# Altium PCB New Gyro 4.0.PcbDoc (part 2 of 2)
Units mm, origin at the board's own origin, x right, y up, seen from the top; angles counter-clockwise.
Board outline 67.56 x 93.22 mm, 4 copper layers (ANALOG, GND, VCC, DIGITAL); 253 components, 139 nets, 766 pads, 207 vias.
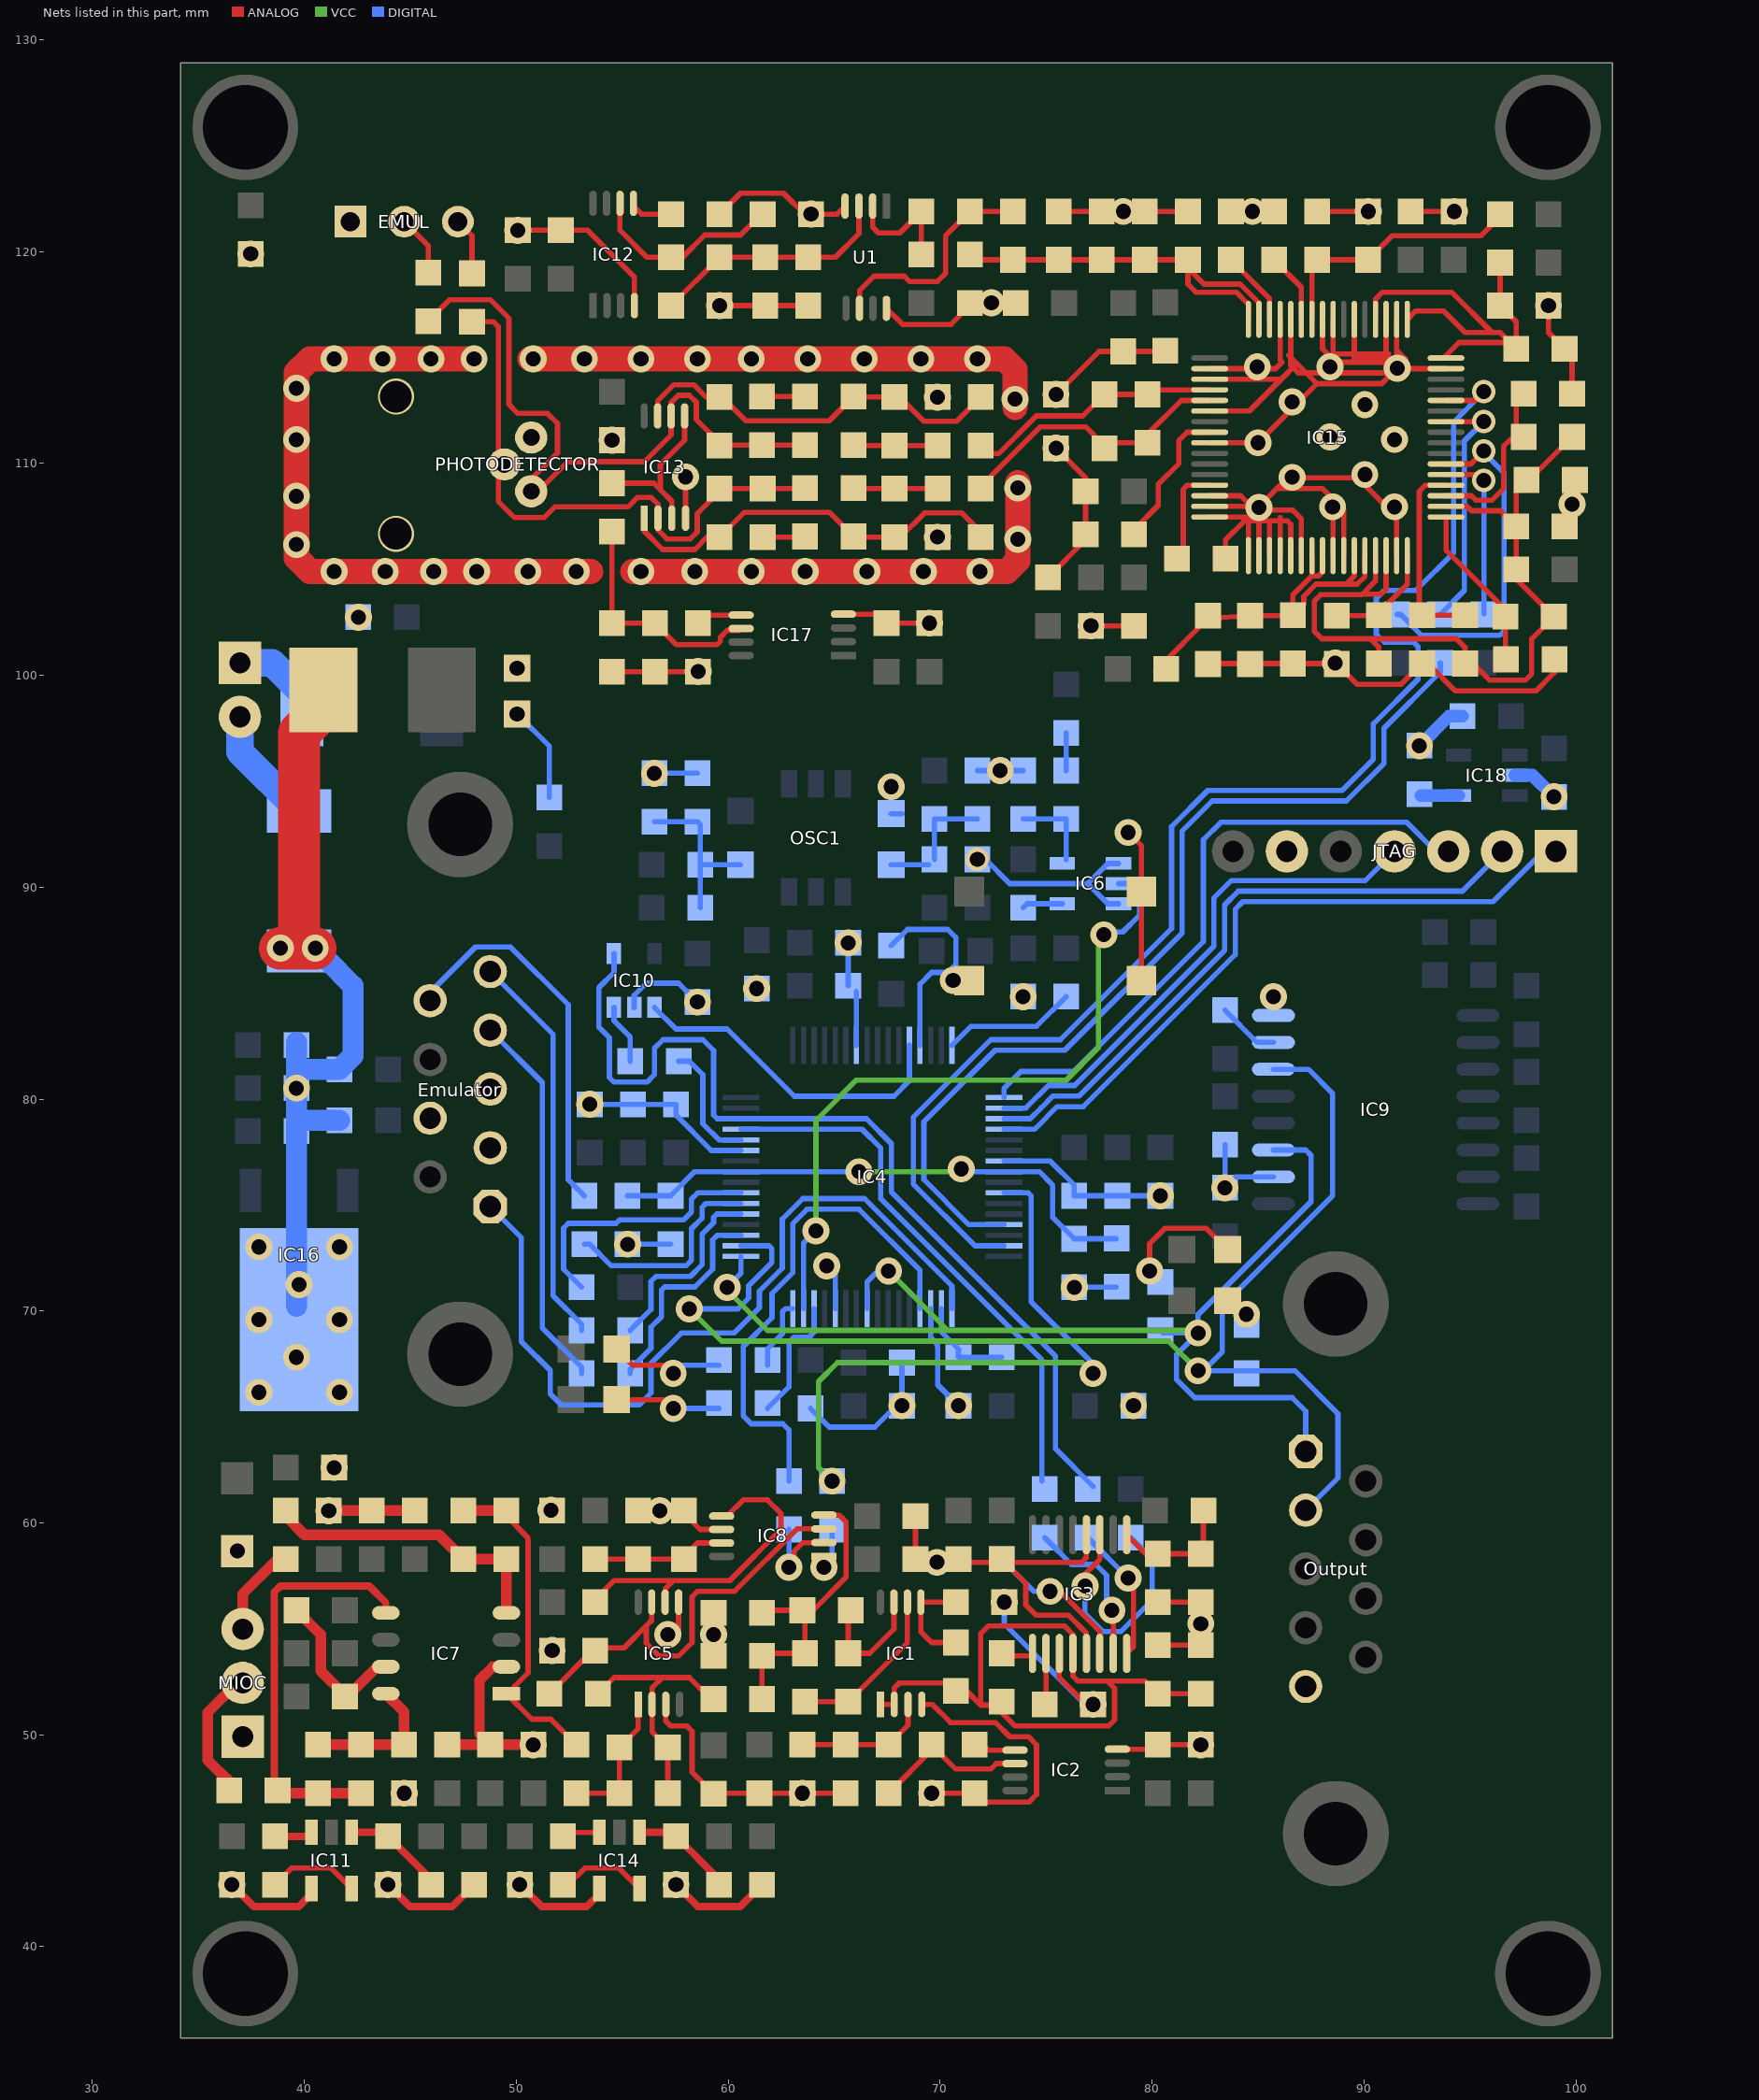
[diagram p4: the nets of this part, all layers, seen from the top]

## Via types
v1: diameter 1.27, hole 0.711, ANALOG to DIGITAL, 198 vias
v2: diameter 1.1, hole 0.711, ANALOG to DIGITAL, 7 vias
v3: diameter 1.7, hole 1.5, ANALOG to DIGITAL, 2 vias

## Nets (pads, with @x,y where several pads share a name; then routed paths per layer and width w, separated by ;. In a path a pad name is that pad's centre, name@x,y a point inside that pad or via, vN(x,y) a via of type N, cw(c..) or ccw(c..) an arc to the next point about the centre after c; other vN are vias at no path point) (continued)
GND: C1.1 C2.1 C3.1 C4.1 C5.1 C6.1 C7.1 C8.1 C9.1 C10.1 C11.1 C12.1 C13.1 C14.1 C15.1 C16.2 C17.2 C18.1 C19.1 C20.1 C21.1 C22.2 C23.2 C24.1 C25.1 C26.2 C27.2 C28.2 C29.1 C30.1 C31.1 C34.1 C35.2 C36.2 C38.1 C40.2 C41.2 C42.1 C43.1 C44.1 C45.1 C47.1 C48.1 C49.2 C50.2 C51.1 C53.2 C54.1 C55.1 C56.1 C57.1 C58.1 C59.1 C66.1 C67.1 C68.2 C69.2 C70.2 C71.2 C72.2 C73.1 C74.1 C75.2 C76.2 C77.2 C78.2 C79.2 C80.2 C81.1 C82.1 C84.1 C85.2 C86.2 C88.2 C89.1 C90.2 C91.2 C92.2 C93.2 C94.2 C95.1 C96.2 C97.2 C98.1 C99.1 C100.2 C101.1 C102.1 C103.1 C104.1 C105.1 C106.1 C107.2 C108.2 C109.2 C110.2 C112.2 C113.2 C114.2 C116.2 C117.2 C118.2 C119.2 C120.1 C121.2 C122.1 C123.1 C126.1 C127.2 C128.1 C129.1 C130.1 C131.1 C132.2 C133.1 CAL.2 D6.K EMUL.1 Emulator.2 Emulator.3 Emulator.7 IC1.4 IC2.4 IC3.4 IC3.13 IC4.3 IC4.12 IC4.27 IC4.39 IC4.55 IC5.3 IC5.5 IC6.1 IC6.3 IC7.2 IC8.6 IC9.2 IC9.8 IC10.2 IC11.4 IC12.4 IC13.4 IC14.4 IC15.2 IC15.3 IC15.6 IC15.9 IC15.14 IC15.15 IC15.16 IC15.17 IC15.18 IC15.19 IC15.20 IC15.21 IC15.22 IC15.25 IC15.26 IC15.31 IC15.47 IC15.50 IC15.51 IC15.54 IC15.56 IC15.57 IC15.60 IC15.61 IC16.2 IC17.4 IC18.2 JTAG.6 L8.1 MIOC.1 OSC1.4 Output.5 PHOTODETECTOR.S R8.1 R32.1 R41.2 R63.1 R65.1 R66.1 R71.1 R73.1 R76.2 RST.2 U1.4 U1.8 | length 465.2
  ANALOG w0.25: IC11.4@40.325,42.484 IC11.4@40.325,42.742 ; C74.1@43.839,42.926 v1(43.942,42.926) ; C41.2@48.26,50.038 C41.2@48.768,49.53 ; IC7.2@48.895,53.213 IC7.2@49.53,53.213 ; v1(50.066,121.003) C89.1@52.098,121.003 53.368,121.003 55.572,118.799 IC12.4@55.572,117.447 ; IC14.4@53.914,42.484 IC14.4@53.914,42.742 ; C122.1@54.511,100.175 C123.1@56.543,100.175 v1(58.575,100.175) ; v1(56.769,60.579) 57.785,60.579 58.674,59.69 IC8.6@59.69,59.69 ; IC5.3@57.053,51.435 57.053,50.643 57.277,50.419 58.039,50.419 58.293,50.165 58.293,48.235 C34.1@59.309,47.219 59.334,47.244 C35.2@61.468,47.244 v1(63.5,47.244) C28.2@65.532,47.244 ; v1@57.277,54.483 57.658,54.864 IC5.5@57.658,56.261 ; IC13.4@57.985,107.414 v1(57.985,109.364) ; C54.1@59.309,53.721 C53.2@59.309,55.753 ; v1(59.591,117.447) C94.2@61.75,117.447 C95.1@63.782,117.447 ; C92.2@59.591,121.765 60.576,122.75 62.608,122.75 63.592,121.765 v1(63.909,121.765) 65.134,121.765 U1.4@65.515,122.146 ; IC17.4@65.433,102.887 67.039,102.887 C120.1@67.465,102.461 v1(69.497,102.461) ; U1.8@67.465,117.32 68.227,116.558 70.513,116.558 71.529,117.574 C71.2@73.561,117.574 ; C14.1@68.834,60.325 C13.1@68.834,58.293 68.985,58.142 C31.1@72.898,58.142 ; IC1.4@69.133,51.435 69.624,51.435 70.482,50.577 72.613,50.577 73.279,49.911 74.168,49.911 74.549,49.53 74.549,47.184 74.186,46.821 72.051,46.821 C27.2@71.628,47.244 v1(69.596,47.244) ; C31.1@72.898,58.293 C31.1@73.049,58.142 ; C101.1@75.085,104.62 76.863,106.398 R66.1@76.863,106.652 C102.1@76.863,108.684 76.863,109.319 v1(75.466,110.716) ; v1(75.466,113.256) 77.498,115.288 C96.2@78.641,115.288 C97.2@80.597,115.288 ; C78.2@75.593,121.892 C79.2@77.625,121.892 C80.2@79.657,121.892 C84.1@81.689,121.892 ; 76.898,54.807 76.063,55.642 74.533,55.642 74.041,56.134 74.041,57.15 C31.1@73.049,58.142 ; IC3.4@76.898,59.442 76.898,58.356 76.684,58.142 C31.1@73.049,58.142 ; v1(77.117,102.334) C104.1@79.149,102.334 ; IC2.4@78.359,49.321 C24.1@80.055,49.321 ; v1(78.867,92.583) 79.502,91.948 CAL.2@79.502,85.598 ; C24.1@80.264,49.53 v1(82.296,49.53) ; C18.1@80.264,54.229 C15.1@82.296,54.229 C16.2@82.296,56.261 C17.2@80.264,56.261 ; C116.2@82.668,100.556 C118.2@86.642,100.556 88.687,100.556 R73.1@88.713,100.531 89.672,99.571 91.753,99.571 R63.1@92.738,100.556 93.02,100.556 94.309,99.268 98.125,99.268 98.986,100.129 R71.1@98.986,100.752 ; IC15.16@82.718,107.474 84.543,107.474 ; IC15.15@82.718,107.974 v1@84.685,107.974 ; IC15.14@82.718,108.474 84.185,108.474 v1@84.685,107.974 ; IC15.9@82.718,110.974 v1(84.995,110.974) 87.785,113.764 ; IC15.6@82.718,112.474 84.59,112.474 86.09,113.974 ; IC15.3@82.718,113.974 86.09,113.974 ; IC15.2@82.718,114.474 85.828,114.474 86.134,114.78 86.043,114.871 IC15.61@86.043,116.799 ; C112.2@83.467,105.509 83.467,106.398 84.356,107.287 ; 84.356,107.414 84.356,107.287 ; IC15.17@84.543,105.649 84.543,107.287 ; v1@85.019,107.95 86.388,109.319 89.69,109.319 91.543,107.466 IC15.31@91.543,105.649 ; IC15.18@85.043,105.649 85.043,107.287 ; v1(85.043,107.926) v1@85.043,107.795 ; IC15.19@85.543,105.649 85.543,107.287 ; 86.007,108.811 88.039,108.811 89.043,107.807 IC15.26@89.043,105.649 ; IC15.20@86.043,105.649 86.043,107.442 ; 86.452,115.097 86.833,114.716 ; IC15.21@86.543,105.649 86.543,107.132 86.388,107.287 85.543,107.287 ; IC15.60@86.543,116.799 86.543,114.625 86.896,114.272 91.341,114.272 v1@91.976,114.907 ; IC15.22@87.043,105.649 87.043,107.394 86.642,107.795 v1@85.043,107.795 ; C67.1@87.785,121.892 v1(90.198,121.892) ; IC15.57@88.043,116.799 88.043,115.411 88.674,114.78 91.341,114.78 91.722,115.161 ; IC15.25@88.543,105.649 88.543,107.291 ; IC15.56@88.543,116.799 88.543,115.161 91.162,115.161 ; IC15.54@89.543,116.799 89.543,114.935 v1@91.543,114.935 ; v1@91.043,114.427 IC15.51@91.043,116.799 ; v1@91.543,114.78 IC15.50@91.543,116.799 ; 91.543,115.34 91.722,115.161 ; v1@91.722,114.399 v1@91.722,114.907 ; v1@91.722,114.653 v1@91.976,114.907 ; v1@92.075,114.474 IC15.47@93.868,114.474 ; C69.2@92.23,121.892 v1(94.262,121.892) ; v1(98.707,117.447) 98.707,116.177 C77.2@99.469,115.415 99.822,115.062 R65.1@99.822,113.284 ; C110.2@99.469,107.033 C131.1@99.469,109.065 ; 84.356,107.287 84.543,107.474 ; 84.543,107.287 85.043,107.287 ; 84.543,107.287 84.543,107.474 ; v1@84.685,107.974 84.864,107.795 v1@85.043,107.795 ; 85.043,107.287 85.543,107.287 ; 85.043,107.287 v1@85.043,107.795 ; 86.09,113.974 86.833,114.716 ; 86.833,114.716 87.785,113.764 ; 87.785,113.764 90.833,113.764 v1@91.976,114.907 ; 91.722,115.161 v1@91.976,114.907
  ANALOG w0.35: v1(36.576,42.926) 37.611,41.891 39.732,41.891 IC11.4@40.325,42.484 ; v1(43.942,42.926) 44.977,41.891 46.971,41.891 C75.2@48.006,42.926 ; v1(50.165,42.926) 51.2,41.891 53.321,41.891 IC14.4@53.914,42.484 ; v1(57.531,42.926) 58.566,41.891 60.56,41.891 C100.2@61.595,42.926
  ANALOG w0.5: v1(41.148,60.579) C49.2@43.18,60.579 C50.2@45.212,60.579 ; C40.2@46.736,49.53 C41.2@48.768,49.53 v1(50.8,49.53) ; C41.2@48.26,50.038 48.26,52.578 IC7.2@48.895,53.213
  ANALOG w1.2: 39.624,105.537 39.624,114.3 40.259,114.935 v1(48.006,114.935) ; 39.751,105.41 40.259,104.902 v1(48.133,104.902) v1(50.546,104.902) 53.499,104.902 ; v1@50.641,114.935 73.025,114.935 73.533,114.427 v1@73.533,112.649 ; v1@55.499,104.902 73.152,104.902 73.66,105.41 v1@73.66,109.093
  ANALOG w2: v1(38.862,87.122) 39.751,87.122 ; v1(40.513,87.122) 39.751,87.122 ; C91.2@40.894,98.425 39.751,97.282 39.751,87.122
  DIGITAL w0.25: v1(53.467,79.756) C2.1@55.499,79.756 C1.1@57.531,79.756 57.531,79.248 59.202,77.577 IC4.27@60.592,77.577 ; v1(55.245,73.152) C57.1@57.277,73.152 ; IC10.2@55.562,84.328 55.562,84.9 56.134,85.471 57.658,85.471 v1(58.547,84.582) ; v1(56.515,95.377) C21.1@58.547,95.377 ; C7.1@63.881,65.405 64.764,64.522 66.923,64.522 67.933,65.532 v1(68.199,65.532) C8.1@68.199,67.564 ; v1(64.643,72.136) 65.052,71.727 IC4.12@65.052,70.117 ; C10.1@65.659,85.344 v1(65.659,87.376) ; IC4.39@66.052,82.537 C10.1@66.052,85.078 ; OSC1.4@67.691,93.472 OSC1.4@68.199,93.472 ; IC4.3@69.552,70.117 69.552,68.751 69.85,68.453 69.85,68.398 69.881,68.367 69.881,66.517 v1(70.866,65.532) ; v2(71.755,91.313) 72.136,91.313 73.279,90.17 76.962,90.17 ; C25.1@71.755,95.504 C47.1@73.914,95.504 ; IC4.55@73.012,77.077 75.196,77.077 76.327,75.946 C4.1@76.327,75.438 C5.1@78.359,75.438 v1(80.391,75.438) ; v1(76.327,71.12) C58.1@78.308,71.12 ; IC6.3@78.416,89.22 77.912,89.22 76.962,90.17 ; IC6.1@78.416,91.12 77.912,91.12 76.962,90.17 ; R32.1@83.439,77.851 v1(83.439,75.819) 83.947,76.327 IC9.2@85.725,76.327
  DIGITAL w0.6: v1(92.616,96.68) 94.013,98.077 C130.1@94.648,98.077 ; IC18.2@97.118,95.283 97.95,95.283 v1(98.966,94.267)
  DIGITAL w1: IC16.2@39.624,70.231 C105.1@39.624,78.994 ; C127.2@39.624,82.677 39.624,81.407 ; L8.1@41.021,86.614 42.291,85.344 42.291,82.042 C106.1@41.656,81.407 39.624,81.407 ; C108.2@41.656,78.994 C105.1@39.624,78.994 ; C105.1@39.624,78.994 39.624,81.407
  other v1: 44.704,47.244 51.689,53.975 57.15,54.737 59.309,54.737 82.296,55.245 69.85,58.142 36.83,58.674 51.638,60.604 41.402,62.611 79.121,65.532 37.846,66.167 41.656,66.167 39.624,67.818 37.846,69.596 41.656,69.596 39.751,71.247 37.846,73.025 41.656,73.025 39.624,80.518 73.914,84.836 85.725,84.836 61.341,85.217 67.691,94.742 72.834,95.504 50.038,100.33 88.646,100.584 42.545,102.743 41.402,104.902 43.815,104.902 46.101,104.902 52.832,104.902 55.88,104.902 58.42,104.902 61.087,104.902 63.627,104.902 66.548,104.902 69.215,104.902 71.882,104.902 39.624,106.172 73.66,106.426 69.878,106.525 88.519,107.95 91.44,107.95 99.822,108.077 39.624,108.458 73.66,108.839 86.614,109.347 90.043,109.474 54.511,111.097 39.624,111.125 91.44,111.125 88.392,111.252 90.043,112.776 86.614,112.903 73.533,113.03 69.878,113.129 39.624,113.538 91.567,114.498 84.963,114.554 88.392,114.554 41.402,114.935 43.688,114.935 45.974,114.935 50.8,114.935 53.213,114.935 55.88,114.935 58.547,114.935 61.087,114.935 63.754,114.935 66.421,114.935 69.088,114.935 71.755,114.935 72.418,117.574 37.465,119.888 78.641,121.892 84.737,121.892
  other v3: 44.323,106.68 44.323,113.157
NetC15_2: C15.2 C18.2 C32.2 IC1.1 IC1.2 IC3.12 R14.2 | length 31.3
  ANALOG w0.25: IC1.1@67.183,51.435 IC1.2@67.833,51.435 67.833,52.212 68.072,52.451 R14.2@70.612,52.451 ; R14.2@70.358,52.07 R14.2@70.739,52.07 71.247,52.07 71.913,51.404 ; C15.2@82.296,51.943 C18.2@80.264,51.943 79.665,52.542 77.887,52.542 ; 71.913,51.404 72.548,51.404 73.533,50.419 77.95,50.419 78.232,50.701 78.232,52.197 77.887,52.542 ; 71.913,51.404 71.913,54.768 72.287,55.142 75.856,55.142 76.263,54.735 IC3.12@76.263,53.842 76.263,52.768 76.49,52.542 77.887,52.542
NetC16_1: C16.1 C17.1 IC3.1 L2.2 | length 5.9
  ANALOG w0.25: IC3.1@78.803,59.442 79.698,58.547 C17.1@80.264,58.547 C16.1@82.296,58.547 82.423,58.674 L2.2@82.423,60.579
NetC19_2: C19.2 IC4.2 L1.2 | length 4.7
  DIGITAL w0.25: IC4.2@70.052,70.117 70.052,69.013 70.866,68.199 C19.2@70.866,67.818 L1.2@72.898,67.818
NetC21_2: C21.2 C22.1 OSC1.9 R2.1 R4.1 | length 8.1
  DIGITAL w0.25: C22.1@56.515,93.091 C21.2@58.547,93.091 58.674,92.964 R4.1@58.674,91.059 ; R2.1@58.674,89.027 R4.1@58.674,91.059 ; OSC1.9@60.579,91.059 R4.1@58.674,91.059
NetC25_2: C25.2 OSC1.5 R1.1 R5.1 | length 5.7
  DIGITAL w0.25: OSC1.5@67.691,91.059 R5.1@69.469,91.059 ; R5.1@69.723,91.313 R1.1@69.723,93.218 C25.2@71.755,93.218
NetC26_1: C26.1 IC2.6 R9.1 | length 7.6
  ANALOG w0.25: R9.1@67.564,47.244 69.596,49.276 C26.1@69.596,49.53 70.739,48.387 72.39,48.387 72.644,48.641 IC2.6@73.533,48.641
NetC27_1: C27.1 IC2.5 | length 1.6
  ANALOG w0.25: C27.1@72.009,49.53 72.263,49.276 IC2.5@73.533,49.276
NetC28_1: C28.1 C29.2 IC1.3 R9.2 | length 6.3
  ANALOG w0.25: C29.2@63.5,49.53 C28.1@65.532,49.53 R9.2@67.564,49.53 68.483,50.449 IC1.3@68.483,51.435
NetC32_1: C32.1 IC3.9 | length 1.5
  ANALOG w0.25: C32.1@72.898,53.721 74.237,53.721 IC3.9@74.358,53.842
NetC33_1: C33.1 IC3.10 | length 2.4
  ANALOG w0.25: C33.1@74.93,51.435 74.993,51.498 IC3.10@74.993,53.842
NetC33_2: C33.2 IC3.11 R13.2 | length 10
  ANALOG w0.25: IC3.11@75.629,53.842 75.62,53.833 75.62,52.705 76.89,51.435 v1(77.216,51.435)
  DIGITAL w0.25: v1(73.025,56.261) 73.025,55.245 76.835,51.435 v1(77.216,51.435)
NetC37_1: C37.1 IC5.7 IC8.3 R18.2 | length 20.3
  ANALOG w0.25: R18.2@51.562,51.943 53.721,54.102 55.087,54.102 56.134,55.149 ; IC5.7@56.388,56.261 56.388,55.403 56.134,55.149 ; IC8.3@64.516,59.72 63.245,59.72 60.302,56.777 58.555,56.777 58.293,56.515 58.293,54.356 57.658,53.721 56.738,53.721 56.134,54.325 56.134,55.149
NetC37_2: C37.2 IC5.6 IC8.5 | length 15.4
  ANALOG w0.25: C37.2@53.721,56.388 54.61,57.277 57.404,57.277 ; IC5.6@57.023,56.261 57.023,56.896 57.404,57.277 ; IC8.5@59.69,60.325 59.944,60.325 60.706,61.087 61.849,61.087 62.484,60.452 62.484,59.69 60.071,57.277 57.404,57.277
NetC39_1: C39.1 IC7.1 R19.2 R22.1 | length 16.4
  ANALOG w0.25: R19.2@47.117,60.579 R19.2@47.498,60.579 ; C39.1@49.53,60.579 49.53,60.325 50.546,59.309 50.546,59.177 50.555,59.168 50.555,52.923 49.911,52.279 49.911,51.943 IC7.1@49.53,51.943 50.736,50.736 51.625,50.736 R22.1@52.832,49.53
  ANALOG w0.5: R19.2@47.498,60.579 C39.1@49.53,60.579
NetC39_2: C39.2 IC7.4 R19.1 R31.2 | length 14
  ANALOG w0.5: R31.2@39.116,60.579 39.116,60.325 40.005,59.436 46.355,59.436 R19.1@47.498,58.293 C39.2@49.53,58.293 IC7.4@49.53,55.753
NetC44_2: C44.2 C45.2 IC8.7 L3.2 | length 6.3
  ANALOG w0.25: L3.2@53.721,58.293 C44.2@55.753,58.293 57.785,58.293 58.547,59.055 IC8.7@59.69,59.055
NetC46_1: C46.1 IC5.1 R22.2 R37.1 | length 6.6
  ANALOG w0.25: R22.2@52.832,47.244 R37.1@54.864,47.244 C46.1@54.864,49.403 55.753,50.292 IC5.1@55.753,51.435
NetC46_2: C46.2 IC5.2 R18.1 R37.2 R38.2 | length 12.2
  ANALOG w0.25: R18.1@53.848,51.943 54.61,52.705 56.896,52.705 ; R37.2@57.15,47.244 C46.2@57.15,49.403 56.403,50.15 IC5.2@56.403,51.435 56.403,52.212 56.896,52.705 ; R38.2@59.309,51.689 59.182,51.689 58.166,52.705 56.896,52.705
NetC47_2: C47.2 IC6.5 R39.2 | length 3.9
  DIGITAL w0.25: C47.2@73.914,93.218 R39.2@75.946,93.218 IC6.5@75.946,91.304
NetC52_1: C52.1 IC7.8 R41.1 R43.2 | length 6.8
  ANALOG w0.5: C52.1@40.64,49.53 R43.2@42.672,49.53 R41.1@44.704,49.53 44.704,51.079 IC7.8@43.84,51.943
NetC52_2: C52.2 IC7.5 R36.2 R43.1 | length 20.1
  ANALOG w0.25: R36.2@38.481,47.625 R36.2@38.735,47.371
  ANALOG w0.35: R36.2@38.989,47.117 38.588,47.518 38.588,56.749 38.862,57.023 43.053,57.023 43.84,56.236 IC7.5@43.84,55.753
  ANALOG w0.5: R36.2@38.862,47.244 C52.2@40.64,47.244 R43.1@42.672,47.244
NetC53_1: C53.1 C54.2 IC8.4 R38.1 R42.1 R46.1 | length 14.5
  ANALOG w0.25: R38.1@61.595,51.689 C54.2@61.595,53.721 ; C54.2@61.595,53.848 R46.1@63.627,53.848 63.627,55.753 R42.1@63.5,55.88 ; C53.1@61.595,55.88 R42.1@63.5,55.88 ; IC8.4@64.516,60.37 65.233,60.37 65.563,60.04 65.563,57.435 64.008,55.88 R42.1@63.5,55.88
NetC62_1: C62.1 IC1.7 R42.2 | length 6
  ANALOG w0.25: R42.2@65.786,55.88 65.659,55.753 C62.1@65.659,53.848 66.675,53.848 67.818,54.991 IC1.7@67.818,56.261
NetC62_2: C62.2 IC1.6 R46.2 | length 7.9
  ANALOG w0.25: R46.2@63.627,51.562 C62.2@65.659,51.562 68.453,54.356 IC1.6@68.453,56.261
NetC64_1: C64.1 IC11.3 | length 1.5
  ANALOG w0.35: C64.1@38.608,45.212 IC11.3@40.141,45.212
NetC64_2: C64.2 IC11.5 | length 4.3
  ANALOG w0.25: C64.2@38.608,42.926 39.399,43.717 41.25,43.717 IC11.5@42.225,42.742
NetC65_1: C65.1 R47.1 U1.2 | length 5.9
  ANALOG w0.25: U1.2@66.815,122.146 66.815,121.145 67.084,120.876 68.1,120.876 C65.1@69.116,121.892 R47.1@69.116,119.86
NetC65_2: C65.2 R52.1 U1.6 | length 10.9
  ANALOG w0.25: U1.6@66.195,117.32 66.195,118.154 66.877,118.836 68.307,118.836 68.553,118.59 69.878,118.59 70.259,118.971 70.259,120.749 C65.2@71.402,121.892 R52.1@73.434,121.892
NetC66_2: C66.2 C67.2 IC15.58 L5.2 | length 12.5
  ANALOG w0.25: IC15.58@87.543,116.799 87.543,119.364 C67.2@87.785,119.606 C66.2@90.198,119.606 91.341,120.749 95.532,120.749 96.421,121.638 L5.2@96.421,121.765
NetC70_1: C70.1 R48.2 R49.1 | length 3.9
  ANALOG w0.25: R48.2@65.941,108.811 R49.1@67.846,108.811 C70.1@69.878,108.811
NetC74_2: C74.2 IC11.1 R50.1 | length 4.7
  ANALOG w0.25: R50.1@45.974,42.926 R50.1@45.974,43.18
  ANALOG w0.35: IC11.1@42.225,45.396 C74.2@43.758,45.396 ; C74.2@43.942,45.212 R50.1@45.974,43.18
NetC76_1: C76.1 C77.1 IC15.48 IC15.49 IC15.52 L6.1 | length 21.2
  ANALOG w0.25: IC15.52@90.543,116.799 90.543,117.756 90.869,118.082 94.135,118.082 96.04,116.177 ; IC15.49@92.043,116.799 92.437,117.193 93.754,117.193 94.77,116.177 96.04,116.177 ; IC15.48@93.754,114.974 94.485,115.705 C77.1@96.893,115.705 ; L6.1@96.421,119.479 C76.1@96.421,117.447 97.183,116.685 C77.1@97.183,115.415 C77.1@96.893,115.705 ; 96.04,116.177 96.421,116.177 C77.1@96.893,115.705
NetC78_1: C78.1 C79.1 C80.1 C84.2 IC15.63 IC15.64 R47.2 R52.2 | length 20.2
  ANALOG w0.25: R47.2@71.529,119.86 71.783,119.606 R52.2@73.434,119.606 C78.1@75.593,119.606 C79.1@77.625,119.606 C80.1@79.657,119.606 C84.2@81.689,119.606 C84.2@81.689,119.225 ; IC15.64@84.543,116.799 84.543,117.514 83.975,118.082 82.07,118.082 81.689,118.463 C84.2@81.689,119.225 ; IC15.63@85.043,116.799 85.043,117.577 84.157,118.463 82.451,118.463 C84.2@81.689,119.225
NetC81_2: C81.2 IC15.62 | length 3.6
  ANALOG w0.25: C81.2@83.721,119.606 85.543,117.784 IC15.62@85.543,116.799
NetC82_2: C82.2 IC15.59 | length 3.3
  ANALOG w0.25: C82.2@85.753,119.606 87.043,118.316 IC15.59@87.043,116.799
NetC83_1: C83.1 C124.2 | length 2
  ANALOG w0.25: C83.1@61.623,106.525 C124.2@63.599,106.525
NetC83_2: C83.2 IC13.2 PHOTODETECTOR.K R48.1 R51.1 R54.2 | length 27.8
  ANALOG w0.25: R54.2@47.907,116.685 48.923,116.685 49.149,116.459 49.149,108.204 49.911,107.442 51.308,107.442 51.816,107.95 55.266,107.95 55.705,108.389 56.365,108.389 56.685,108.069 56.685,106.861 57.107,106.439 58.213,106.439 58.535,106.761 58.535,107.628 59.718,108.811 C83.2@61.623,108.811 R48.1@63.599,108.811
NetC87_1: C87.1 IC14.3 | length 1.5
  ANALOG w0.25: C87.1@52.381,45.396 IC14.3@53.914,45.396
NetC87_2: C87.2 IC14.5 | length 4.3
  ANALOG w0.25: C87.2@52.197,42.926 52.448,42.926 53.239,43.717 54.839,43.717 IC14.5@55.814,42.742
NetC90_1: C90.1 IC12.6 R53.1 | length 9.2
  ANALOG w0.25: IC12.6@54.892,122.146 54.892,121.003 56.162,119.733 R53.1@57.305,119.733 57.841,119.733 58.889,120.78 60.576,120.78 61.56,121.765 C90.1@61.623,121.765
NetC92_1: C92.1 IC12.5 | length 1.9
  ANALOG w0.25: IC12.5@55.527,122.146 55.908,121.765 C92.1@57.305,121.765
NetC93_1: C93.1 C94.1 C95.2 R53.2 U1.3 | length 11.6
  ANALOG w0.25: R53.2@57.305,117.447 C93.1@59.591,119.733 C94.1@61.75,119.733 C95.2@63.782,119.733 65.052,119.733 66.165,120.846 U1.3@66.165,122.146
NetC99_2: C99.2 IC14.1 R55.1 | length 4.9
  ANALOG w0.25: C99.2@57.347,45.396 C99.2@57.531,45.212 ; R55.1@59.563,42.926 R55.1@59.563,43.18
  ANALOG w0.35: IC14.1@55.814,45.396 C99.2@57.347,45.396 ; C99.2@57.531,45.212 R55.1@59.563,43.18
NetC109_1: C109.1 C111.1 IC15.4 R60.2 | length 11.7
  ANALOG w0.25: R60.2@71.91,110.462 72.755,110.462 74.533,112.24 76.736,112.24 C109.1@77.752,113.256 C111.1@79.784,113.256 C111.1@80.002,113.474 ; C111.1@80.383,113.474 IC15.4@82.718,113.474
NetC110_1: C110.1 C131.2 IC15.29 IC15.30 IC15.34 L10.1 R62.1 R64.1 R70.1 R72.1 | length 39.1
  ANALOG w0.25: IC15.29@90.543,105.649 90.543,104.457 89.913,103.827 ; R72.1@90.706,100.556 90.706,101.318 90.297,101.727 ; IC15.30@91.043,105.649 91.043,104.068 90.802,103.827 89.913,103.827 ; IC15.34@93.868,107.974 94.862,107.974 95.069,107.767 96.449,107.767 C110.1@97.183,107.033 ; R64.1@99.822,111.252 97.79,109.22 C131.2@97.663,109.22 97.183,108.74 C110.1@97.183,107.033 ; 89.913,103.827 89.887,103.801 87.948,103.801 87.658,103.511 87.658,102.08 88.011,101.727 90.297,101.727 ; 90.297,101.727 94.361,101.727 94.77,101.318 R62.1@94.77,100.556 95.147,100.556 95.935,99.768 97.609,99.768 97.917,100.076 97.917,101.727 R70.1@98.961,102.771 97.183,104.549 L10.1@97.183,105.001 C110.1@97.183,107.033
NetC111_2: C111.2 C114.1 IC15.5 R69.2 | length 14.6
  ANALOG w0.25: R69.2@71.734,108.733 74.732,111.732 76.863,111.732 C114.1@77.752,110.843 ; R69.2@71.91,108.811 R69.2@71.91,109.065 ; C114.1@77.752,110.97 C111.2@79.784,110.97 ; C111.2@80.269,111.455 C111.2@79.784,110.97 ; IC15.5@82.718,112.974 81.379,112.974 79.784,111.379 C111.2@79.784,110.97
NetC112_1: C112.1 IC15.13 | length 4.4
  ANALOG w0.25: C112.1@81.468,105.669 81.468,108.783 81.659,108.974 IC15.13@82.718,108.974
NetC113_1: C113.1 R67.2 R68.1 | length 3.9
  ANALOG w0.25: R67.2@65.941,110.843 R68.1@67.846,110.843 C113.1@69.878,110.843
NetC115_1: C115.1 C125.2 | length 2
  ANALOG w0.25: C115.1@61.595,113.157 C125.2@63.627,113.157
NetC115_2: C115.2 IC13.6 PHOTODETECTOR.A R56.1 R67.1 R74.1 | length 33.4
  ANALOG w0.25: R56.1@45.847,116.713 46.863,117.729 48.768,117.729 49.649,116.848 49.649,112.784 50.072,112.361 51.469,112.361 51.943,111.887 51.943,110.49 50.447,108.994 50.447,108.105 52.423,110.081 56.043,110.081 57.305,111.343 IC13.6@57.305,112.24 57.305,112.875 57.645,113.215 58.168,113.215 58.49,112.893 58.49,112.071 R74.1@59.655,110.906 ; R74.1@59.619,110.871 C115.2@61.595,110.871 ; C115.2@61.595,110.843 C115.2@61.75,110.843 ; C115.2@61.778,110.871 R67.1@63.627,110.871
NetC116_1: C116.1 C117.1 C118.1 IC15.23 IC15.24 IC15.27 IC15.28 L9.2 | length 18.5
  ANALOG w0.25: L9.2@80.165,100.175 L9.2@80.255,100.175 ; L9.2@80.255,100.302 82.642,102.69 C117.1@84.623,102.817 86.617,102.817 C118.1@86.642,102.842 87.158,103.358 87.158,103.718 87.741,104.301 89.152,104.301 ; C118.1@86.642,103.223 86.642,103.791 87.543,104.692 ; IC15.23@87.543,105.649 87.543,104.692 ; IC15.24@88.043,105.649 88.043,104.878 87.857,104.692 87.543,104.692 ; IC15.27@89.543,105.649 89.543,104.692 89.152,104.301 ; IC15.28@90.043,105.649 90.043,104.664 89.68,104.301 89.152,104.301
NetC121_1: C121.1 IC17.5 | length 2.1
  ANALOG w0.25: C121.1@58.575,102.461 C121.1@58.956,102.842 ; C121.1@59.083,102.842 IC17.5@60.607,102.842
NetC122_2: C122.2 C123.2 IC17.6 R75.2 | length 11.3
  ANALOG w0.25: R75.2@54.511,106.779 C122.2@54.511,102.461 C123.2@56.543,102.461 57.559,101.445 59.464,101.445 59.632,101.613 59.632,101.8 59.954,102.122 60.522,102.122 IC17.6@60.607,102.207
NetC124_1: C124.1 IC13.1 R49.2 R51.2 R69.1 | length 18.6
  ANALOG w0.25: IC13.1@56.035,107.414 56.035,106.804 56.9,105.939 58.42,105.939 R51.2@59.006,106.525 ; R51.2@59.591,106.525 60.762,107.696 64.77,107.696 C124.1@65.913,106.553 65.941,106.525 R49.2@67.846,106.525 68.128,106.525 69.271,107.668 71.021,107.668 71.91,106.779 R69.1@71.91,106.525
NetC125_1: C125.1 IC13.7 R60.1 R68.2 R74.2 | length 18.4
  ANALOG w0.25: IC13.7@56.67,112.24 56.67,112.947 57.438,113.715 58.375,113.715 58.961,113.129 R74.2@59.591,113.129 59.718,113.129 60.833,112.014 64.77,112.014 C125.1@65.913,113.157 ; C125.1@65.941,113.129 R68.2@67.846,113.129 68.1,113.129 69.243,111.986 70.767,111.986 R60.1@71.91,113.129
NetC129_2: C129.2 IC18.4 | length 1.8
  DIGITAL w0.6: C129.2@92.677,94.333 IC18.4@94.464,94.333
NetCAL_1: CAL.1 IC4.45 R3.2 | length 9.8
  DIGITAL w0.25: R3.2@67.691,87.249 68.453,88.011 70.358,88.011 70.739,87.63 70.739,86.36 70.358,85.979 69.596,85.979 69.052,85.435 IC4.45@69.052,82.537
  other v1: 70.612,85.598
NetD1_K: D1.K R16.2 | length 5
  ANALOG w0.25: D1.K@54.734,65.817 56.992,65.817 v1(57.404,65.405)
  DIGITAL w0.25: v1(57.404,65.405) R16.2@59.563,65.405
NetD2_K: D2.K R17.2 | length 5.8
  ANALOG w0.25: D2.K@54.737,68.199 55.499,67.437 57.023,67.437 v1(57.404,67.056) v1@57.658,66.802
  DIGITAL w0.25: v1(57.404,67.056) 57.785,67.437 R17.2@59.563,67.437
NetD6_A: D6.A R58.1 | length 4.6
  DIGITAL w0.25: v1(50.038,98.171) 51.562,96.647 R58.1@51.562,94.234
NetEMUL_2: EMUL.2 R56.2 | length 2.9
  ANALOG w0.254: EMUL.2@44.704,121.412 45.847,120.269 R56.2@45.847,118.999
NetEMUL_3: EMUL.3 R54.1 | length 2.7
  ANALOG w0.25: EMUL.3@47.244,121.412 47.907,120.749 R54.1@47.907,118.971
NetIC1_5: IC1.5 R13.1 R14.1 | length 4.9
  ANALOG w0.25: R14.1@70.739,54.356 69.596,54.356 69.088,54.864 IC1.5@69.088,56.261 R13.1@70.739,56.261
NetIC3_3: IC3.3 R11.1 | length 11.3
  ANALOG w0.25: v1@76.581,57.332 77.534,58.284 IC3.3@77.534,59.442
  DIGITAL w0.25: v1(76.835,57.023) 76.835,55.722 77.687,54.87 78.523,54.87 80.01,56.357 80.01,58.293 R11.1@78.994,59.309
NetIC3_14: IC3.14 R12.1 | length 7
  ANALOG w0.25: v1@75.184,56.642 75.771,56.642 77.534,54.879 IC3.14@77.534,53.842
  DIGITAL w0.25: R12.1@72.898,58.293 74.422,56.769 v1(75.184,56.769)
NetIC3_15: IC3.15 R10.1 | length 7.3
  ANALOG w0.25: IC3.15@78.168,53.842 v1@78.168,55.689
  DIGITAL w0.25: R10.1@74.93,59.309 76.2,58.039 77.343,58.039 77.857,57.525 77.857,56.007 77.984,55.88 v1(78.105,55.88)
NetIC3_16: IC3.16 R7.1 | length 6.5
  ANALOG w0.25: IC3.16@78.803,53.842 79.121,54.16 79.121,57.277 v1@78.93,57.468
  DIGITAL w0.25: R7.1@76.962,59.309 v1(78.867,57.404)
NetIC4_14: IC4.14 R16.1 | length 6
  DIGITAL w0.25: R16.1@61.849,65.405 62.865,66.421 62.865,68.519 63.116,68.77 63.817,68.77 64.052,69.005 IC4.14@64.052,70.117
NetIC4_15: IC4.15 IC6.2 | length 33.4
  VCC w0.25: v1(64.135,73.787) 64.135,78.994 66.04,80.899 75.946,80.899 77.47,82.423 77.47,87.503 v1(77.724,87.757)
  DIGITAL w0.25: IC4.15@63.552,70.117 63.552,73.204 63.754,73.406 v1@64.262,73.406 ; v1@77.851,87.884 78.613,87.884 79.375,88.646 79.395,88.646 79.423,88.674 79.423,89.643 78.896,90.17 IC6.2@78.416,90.17
NetIC4_16: IC4.16 R17.1 | length 3.4
  DIGITAL w0.25: R17.1@61.849,67.437 61.849,68.21 62.564,68.925 62.564,69.977 62.704,70.117 IC4.16@63.052,70.117
NetIC4_19: IC4.19 R24.2 | length 10.2
  DIGITAL w0.25: R24.2@55.372,67.056 55.372,67.255 56.357,68.24 56.357,69.238 56.857,69.738 56.857,70.993 57,71.136 58.425,71.136 59.262,71.973 59.262,73.359 59.48,73.577 IC4.19@60.592,73.577
NetIC4_21: IC4.21 R25.2 | length 9.3
  DIGITAL w0.25: R25.2@55.372,69.088 56.357,70.073 56.357,71.397 56.595,71.636 58.218,71.636 58.762,72.18 58.762,73.621 59.309,74.168 59.309,74.422 59.464,74.577 IC4.21@60.592,74.577
NetIC4_22: IC4.22 R26.2 | length 10.2
  DIGITAL w0.25: R26.2@53.213,73.152 53.467,73.152 54.483,72.136 58.011,72.136 58.262,72.387 58.262,73.883 58.762,74.383 58.762,74.891 58.948,75.077 IC4.22@60.592,75.077
NetIC4_23: IC4.23 R27.2 | length 12.6
  DIGITAL w0.25: R27.2@53.086,71.12 52.228,71.978 52.228,73.917 52.448,74.137 54.706,74.137 54.864,74.295 57.884,74.295 58.262,74.673 58.262,75.28 58.559,75.577 IC4.23@60.592,75.577
NetIC4_28: IC4.28 R28.2 | length 5.8
  DIGITAL w0.25: R28.2@57.658,81.788 58.166,81.788 58.801,81.153 58.801,78.838 59.562,78.077 IC4.28@60.592,78.077
NetIC4_48: IC4.48 R6.2 | length 6.3
  DIGITAL w0.25: IC4.48@70.552,82.537 71.454,83.439 74.549,83.439 R6.2@75.946,84.836
NetIC6_4: IC6.4 R21.1 | length 1.9
  DIGITAL w0.25: R21.1@73.914,89.027 74.107,89.22 IC6.4@75.762,89.22
NetIC7_7: IC7.7 R44.1 R45.2 | length 7.1
  ANALOG w0.25: R45.2@41.91,51.879 R45.2@41.91,51.816 R45.2@42.037,51.816
  ANALOG w0.5: R44.1@39.624,55.88 40.767,54.737 40.767,53.022 R45.2@41.91,51.879 ; R45.2@42.037,51.816 IC7.7@43.434,53.213
NetIC8_1: IC8.1 R20.2 | length 1.9
  DIGITAL w0.25: v1(64.516,57.912) 64.897,58.293 R20.2@64.897,59.69
NetIC8_2: IC8.2 R23.2 | length 4.1
  ANALOG w0.25: v1@63.119,57.912 63.119,58.674 63.515,59.07 IC8.2@64.516,59.07
  DIGITAL w0.25: v1(62.865,57.912) R23.2@62.865,59.69
NetIC9_7: IC9.7 R40.1 | length 2.9
  DIGITAL w0.25: R40.1@83.439,84.201 84.963,82.677 IC9.7@85.725,82.677
NetIC15_8: IC15.8 R66.2 | length 6.8
  ANALOG w0.25: R66.2@79.149,106.652 R66.2@79.149,106.756 ; R66.2@79.149,106.883 80.29,108.023 80.29,109.019 81.269,109.998 81.269,111.097 81.646,111.474 IC15.8@82.718,111.474
NetIC15_32: IC15.32 R72.2 R73.2 | length 5.2
  ANALOG w0.25: R73.2@88.713,102.817 R72.2@90.681,102.817 ; R72.2@90.706,102.969 92.043,104.306 IC15.32@92.043,105.649
NetIC15_33: IC15.33 R70.2 R71.2 | length 7.7
  ANALOG w0.25: IC15.33@93.868,107.474 93.881,107.461 93.881,105.89 R70.2@96.774,102.997 ; R71.2@96.675,100.778 R70.2@96.675,102.771
NetIC15_35: IC15.35 R64.2 R65.2 | length 7.5
  ANALOG w0.25: IC15.35@93.868,108.474 95.069,108.474 95.276,108.267 96.042,108.267 96.584,108.809 96.584,110.808 96.901,111.125 ; R64.2@97.183,111.224 R65.2@97.183,113.256
NetIC15_36: IC15.36 R62.2 R63.2 | length 9.1
  ANALOG w0.25: R63.2@92.611,102.969 92.611,108.684 92.901,108.974 IC15.36@93.868,108.974 ; R63.2@92.738,102.842 R62.2@94.77,102.842
NetIC15_37: IC15.37 R61.1 | length 8.2
  ANALOG w0.25: IC15.37@93.868,109.474 95.377,109.474 v2(95.659,109.192)
  DIGITAL w0.25: R61.1@95.659,102.898 v2(95.659,109.192)
NetIC15_38: IC15.38 R59.1 | length 16.5
  ANALOG w0.25: IC15.38@93.868,109.974 95.044,109.974 v2(95.659,110.589)
  DIGITAL w0.25: R59.1@91.567,102.87 91.738,102.87 92.722,101.885 96.396,101.885 96.616,102.105 96.616,109.544 95.659,110.5 v2(95.659,110.589)
NetIC15_42: IC15.42 R57.1 | length 11.7
  ANALOG w0.25: IC15.42@93.868,111.974 v2@95.647,111.974
  DIGITAL w0.25: R57.1@93.599,102.87 94.734,104.005 94.734,111.061 v2(95.659,111.986)
NetL4_2: L4.2 R39.1 | length 1.8
  DIGITAL w0.25: R39.1@75.946,95.504 L4.2@75.946,97.282
NetL7_2: L7.2 POWER.1 | length 4.5
  DIGITAL w0.25: L7.2@39.878,98.171 L7.2@39.878,99.187
  DIGITAL w1.3: POWER.1@36.957,100.584 38.481,100.584 L7.2@39.878,99.187
NetL8_2: L8.2 POWER.2 | length 5.6
  DIGITAL w1.3: POWER.2@36.957,98.044 36.957,96.393 L8.2@39.751,93.599
NetMIOC_2: MIOC.2 R36.1 | length 6.6
  ANALOG w0.25: R36.1@36.449,47.371 36.449,47.796 36.449,48.016 ; MIOC.2@36.83,52.451 MIOC.2@37.084,52.451
  ANALOG w0.5: R36.1@36.449,47.796 35.433,48.812 35.433,51.054 MIOC.2@36.83,52.451
NetMIOC_3: MIOC.3 R31.1 | length 4.4
  ANALOG w0.5: MIOC.3@37.084,54.991 37.084,56.642 38.735,58.293 R31.1@39.116,58.293
NetR34_2: R34.2 RX.K | length 5.7
  ANALOG w0.25: v1(79.883,71.882) 79.883,73.174 80.617,73.908 82.556,73.908 RX.K@83.566,72.898
NetR35_2: R35.2 TX.K | length 2
  ANALOG w0.25: TX.K@83.566,70.485 84.455,69.596 84.455,69.342 v1(84.455,69.85)
REF2.5: IC13.3 IC13.5 R75.1 | length 7.9
  ANALOG w0.25: R75.1@54.511,109.065 56.488,109.065 56.797,108.756 ; IC13.3@57.335,107.414 57.335,108.218 56.797,108.756 ; IC13.5@57.94,112.24 57.94,111.097 56.797,109.954 56.797,108.756
RX: IC4.9 IC4.17 IC9.3 Output.1 R34.1 | length 56.6
  VCC w0.25: v1@59.53,71.407 61.849,69.088 70.358,69.088 ; v1(67.564,71.882) 70.358,69.088 ; v1@82.169,69.088 70.358,69.088
  DIGITAL w0.25: v1(59.944,71.12) 60.592,71.768 IC4.17@60.592,72.577 ; IC4.9@66.552,70.117 66.552,71.378 66.929,71.755 ; R34.1@80.391,69.088 80.518,68.961 v1(82.169,68.961) ; IC9.3@85.725,77.597 87.249,77.597 87.503,77.343 87.503,75.162 82.169,69.828 v1(82.169,68.961) ; Output.1@87.249,63.373 87.249,65.278 86.614,65.913 82.011,65.913 81.153,66.771 81.153,67.945 v1(82.169,68.961)
SSI0CLK: Emulator.4 R24.1 | length 18
  DIGITAL w0.25: Emulator.4@48.768,83.248 51.228,80.788 51.228,69.196 53.086,67.338 R24.1@53.086,67.056
SSI0RX: Emulator.5 R25.1 | length 18.7
  DIGITAL w0.25: Emulator.5@48.768,86.021 51.728,83.061 51.728,70.728 53.086,69.37 R25.1@53.086,69.088
SSI0TX: Emulator.9 R26.1 | length 18.3
  DIGITAL w0.25: Emulator.9@45.932,84.645 45.932,85.044 48.071,87.184 49.722,87.184 52.451,84.455 52.451,76.2 R26.1@53.213,75.438
SSI1CLK: IC4.30 IC10.4 R7.2 | length 45.2
  DIGITAL w0.25: IC10.4@54.61,86.868 54.61,85.979 53.892,85.261 53.892,83.395 54.387,82.9 54.387,81.023 54.607,80.803 56.165,80.803 56.515,81.153 56.515,82.395 56.924,82.804 58.801,82.804 59.309,82.296 59.309,79.248 59.48,79.077 IC4.30@60.592,79.077 66.52,79.077 67.699,77.898 67.699,75.612 75.438,67.873 75.438,63.5 R7.2@77.216,61.722
SSI1RX: IC10.3 R28.1 | length 2.9
  DIGITAL w0.25: IC10.3@54.61,84.328 54.61,83.693 55.372,82.931 R28.1@55.372,81.788
SSI1TX: IC4.29 R10.2 | length 25.8
  DIGITAL w0.25: IC4.29@60.592,78.577 66.313,78.577 67.199,77.691 67.199,75.295 74.803,67.691 R10.2@74.803,61.976
SSI2CLK: IC4.58 R20.1 | length 29.3
  VCC w0.25: v1(64.897,61.976) 64.262,62.611 64.262,66.675 65.151,67.564 76.708,67.564 v1(77.216,67.056)
  DIGITAL w0.25: IC4.58@73.012,75.577 74.156,75.577 74.295,75.438 74.295,70.43 77.415,67.31 v1@77.47,67.31
SSI2TX: IC4.4 R23.1 | length 24.2
  DIGITAL w0.25: R23.1@62.865,61.976 62.865,64.389 62.58,64.674 61.084,64.674 60.706,65.052 60.706,68.326 62.064,69.684 62.064,70.827 63.052,71.815 63.052,74.132 63.723,74.803 66.167,74.803 69.052,71.918 IC4.4@69.052,70.117
SSI3CLK: IC4.61 R57.2 | length 44.8
  DIGITAL w0.25: IC4.61@73.012,74.077 71.355,74.077 69.229,76.203 69.229,78.936 72.597,82.304 75.882,82.304 81.423,87.845 81.423,92.656 82.836,94.069 89.171,94.069 90.94,95.838 90.94,97.5 93.599,100.159 R57.2@93.599,100.584
SSI3RX: IC4.63 IC15.44 | length 64.9
  ANALOG w0.25: IC15.44@93.868,112.974 95.25,112.974 v2(95.659,113.383)
  DIGITAL w0.25: IC4.63@73.012,73.077 71.648,73.077 68.729,75.996 68.729,79.143 72.39,82.804 75.675,82.804 80.923,88.052 80.923,92.863 82.629,94.569 88.964,94.569 90.44,96.045 90.44,97.707 92.552,99.819 92.552,101.349 92.332,101.569 90.963,101.569 90.582,101.95 90.582,103.635 90.96,104.013 92.456,104.013 94.234,105.791 94.234,111.958 v2(95.659,113.383)
SYNC_M: Emulator.1 IC4.1 | length 38.6
  DIGITAL w0.25: Emulator.1@48.768,74.93 50.228,73.47 50.228,68.571 51.601,67.198 51.601,66.084 52.114,65.571 55.792,65.571 56.357,66.136 56.357,67.533 57.785,68.961 60.27,68.961 61.468,70.159 61.468,70.938 62.552,72.022 62.552,74.339 63.516,75.303 66.429,75.303 70.552,71.18 IC4.1@70.552,70.117
TCK: IC4.52 JTAG.1 | length 32.7
  DIGITAL w0.25: IC4.52@73.012,78.577 74.168,78.577 74.457,78.577 ; 74.521,78.641 75.525,79.645 76.758,79.645 83.923,86.81 83.923,88.961 84.281,89.319 96.09,89.319 98.465,91.694 JTAG.1@99.06,91.694
TDI: IC4.50 JTAG.4 | length 24.8
  DIGITAL w0.25: IC4.50@73.012,79.577 74.042,79.577 75.11,80.645 76.344,80.645 82.923,87.224 82.923,89.502 83.74,90.319 90.065,90.319 JTAG.4@91.44,91.694
TDO: IC4.49 JTAG.3 | length 30
  DIGITAL w0.25: IC4.49@73.012,80.077 73.012,80.505 73.811,81.304 76.296,81.304 82.423,87.431 82.423,92.242 83.25,93.069 92.01,93.069 93.385,91.694 JTAG.3@93.98,91.694
TEMP_CS: IC4.44 IC10.1 | length 15.7
  DIGITAL w0.25: IC10.1@56.515,84.328 57.531,83.312 59.944,83.312 63.119,80.137 67.818,80.137 68.552,80.871 IC4.44@68.552,82.537
TMS: IC4.51 JTAG.2 | length 30
  DIGITAL w0.25: IC4.51@73.012,79.077 74.249,79.077 74.762,79.59 75.317,80.145 76.551,80.145 83.423,87.017 83.423,89.168 84.074,89.819 94.645,89.819 JTAG.2@96.52,91.694
TX: IC4.18 IC9.6 Output.2 R35.1 | length 64.1
  VCC w0.25: v1(58.166,70.104) 59.69,68.58 80.772,68.58 v1(82.169,67.183) v1@82.423,67.183
  DIGITAL w0.25: v1@58.547,70.104 60.452,70.104 60.96,70.612 60.96,71.192 62.052,72.284 62.052,72.949 61.924,73.077 IC4.18@60.592,73.077 ; v1(82.169,67.183) 86.741,67.183 88.773,65.151 88.773,62.124 Output.2@87.249,60.6 ; v1@82.169,67.31 82.55,67.31 83.312,68.072 83.312,70.231 88.519,75.438 88.519,80.264 87.376,81.407 IC9.6@85.725,81.407
VDDC: C56.2 C57.2 C58.2 C59.2 IC4.25 IC4.56 | length 25.8
  VCC w0.25: v1(66.171,76.577) 70.862,76.577 v1(70.993,76.708)
  DIGITAL w0.25: C56.2@55.245,75.438 C57.2@57.277,75.438 58.416,76.577 IC4.25@60.592,76.577 v1(66.171,76.577) ; v1(70.993,76.708) 71.124,76.577 IC4.56@73.012,76.577 74.68,76.577 75.311,75.946 75.311,74.422 C59.2@76.327,73.406 C58.2@78.308,73.406
pads on no net: Emulator.BO1 Emulator.BO2 IC2.1 IC2.3 IC2.7 IC2.8 IC3.2 IC3.6 IC3.7 IC3.8 IC4.5 IC4.6 IC4.8 IC4.10 IC4.13 IC4.20 IC4.24 IC4.32 IC4.33 IC4.34 IC4.35 IC4.36 IC4.41 IC4.46 IC4.62 IC4.64 IC9.10 IC9.11 IC9.14 IC12.1 IC12.3 IC12.7 IC12.8 IC15.10 IC15.39 IC15.40 IC15.41 IC15.43 IC15.45 IC17.1 IC17.3 IC17.7 IC17.8 OSC1.1 OSC1.2 OSC1.3 OSC1.6 OSC1.7 OSC1.8 OSC1.10 Output.BO1 Output.BO2 U1.1 U1.5

## Polygon pours and split planes (outlines as drawn)
+3V3D on VCC "Bottom Layer-No Net" (solid, pour order 64): 85.09,35.941 101.473,35.941 101.473,96.774 101.473,97.155 43.18,97.155 43.18,63.5 85.09,63.5
+5VA on VCC "Bottom Layer-No Net" (solid, pour order 66): 83.82,35.941 34.417,35.941 34.417,128.651 101.473,128.651 101.473,98.425 41.91,98.425 41.91,62.23 83.82,62.23
GND on ANALOG "Bottom Layer-No Net" (solid, pour order 9): 34.417,35.941 34.417,128.651 101.473,128.651 101.473,35.941
GND on ANALOG "Bottom Layer-No Net" (solid, pour order 52): 84.13,107.061 84.074,107.117 84.074,115.443 92.456,115.443 92.456,107.061
GND on GND "Bottom Layer-No Net" (solid, pour order 2): 34.417,128.651 101.473,128.651 101.473,35.941 34.417,35.941
GND on DIGITAL "Bottom Layer-No Net" (solid, pour order 11): 34.417,128.651 101.473,128.651 101.473,35.941 34.417,35.941

## Silkscreen, mask and mechanical layers (free items; w line width, h text height)
Top Overlay:
  text "GND" at 41.021,122.936 h1.2
  text "V+" at 44.196,122.936 h1.2
  text "V-" at 46.736,122.936 h1.2
  text "+5" at 35.306,100.076 h1.2 r90
  text "GND" at 35.306,96.901 h1.2 r90
  text "3V3" at 82.804,89.281 h1.1
  text "GND" at 85.09,89.281 h1.1
  text "RST" at 87.757,89.281 h1.1
  text "TDI" at 90.297,89.281 h1.1
  text "TDO" at 92.71,89.281 h1.1
  text "TMS" at 95.377,89.281 h1.1
  text "TCK" at 98.171,89.281 h1.1
  text "V+" at 35.433,54.356 h1.2 r90
  text "V-" at 35.433,52.07 h1.2 r90
  text "GND" at 35.433,48.641 h1.2 r90
  text "New Gyro 1.0 - 2016  DSIF/FEEC/UNICAMP" at 41.148,37.846 h3
Mechanical 1:
  lines w0.254: 34.29,35.814 101.6,35.814 101.6,128.778 34.29,128.778 34.29,35.814

## Text inside footprints (layer, text, board x,y; h text height)
Emulator: Top Overlay "9" at 46.334,86.572 h0.8 r90; Top Overlay "5" at 49.382,87.08 h0.8 r90; Top Overlay "1" at 49.382,72.856 h0.8 r90; Top Overlay "6" at 46.334,73.364 h0.8 r90
Output: Top Overlay "6" at 89.683,64.939 h0.8 r270; Top Overlay "1" at 86.635,65.447 h0.8 r270; Top Overlay "5" at 86.635,51.223 h0.8 r270; Top Overlay "9" at 89.683,51.731 h0.8 r270